# EAGLE board OpenAT_Switch_Latch (EAGLE 9.6.2)
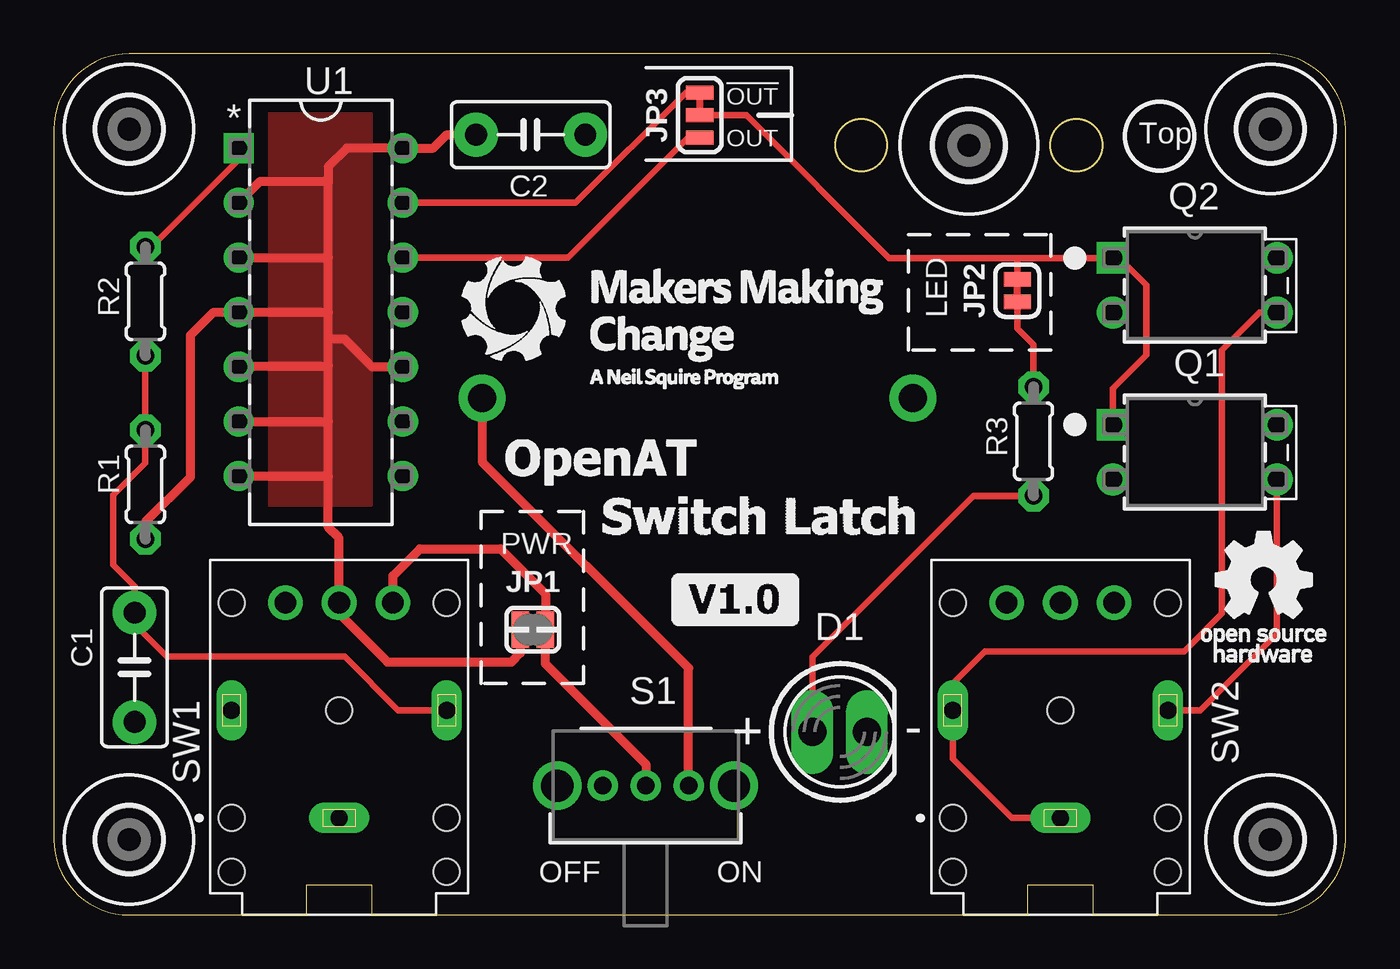
[diagram p0: board, top side]
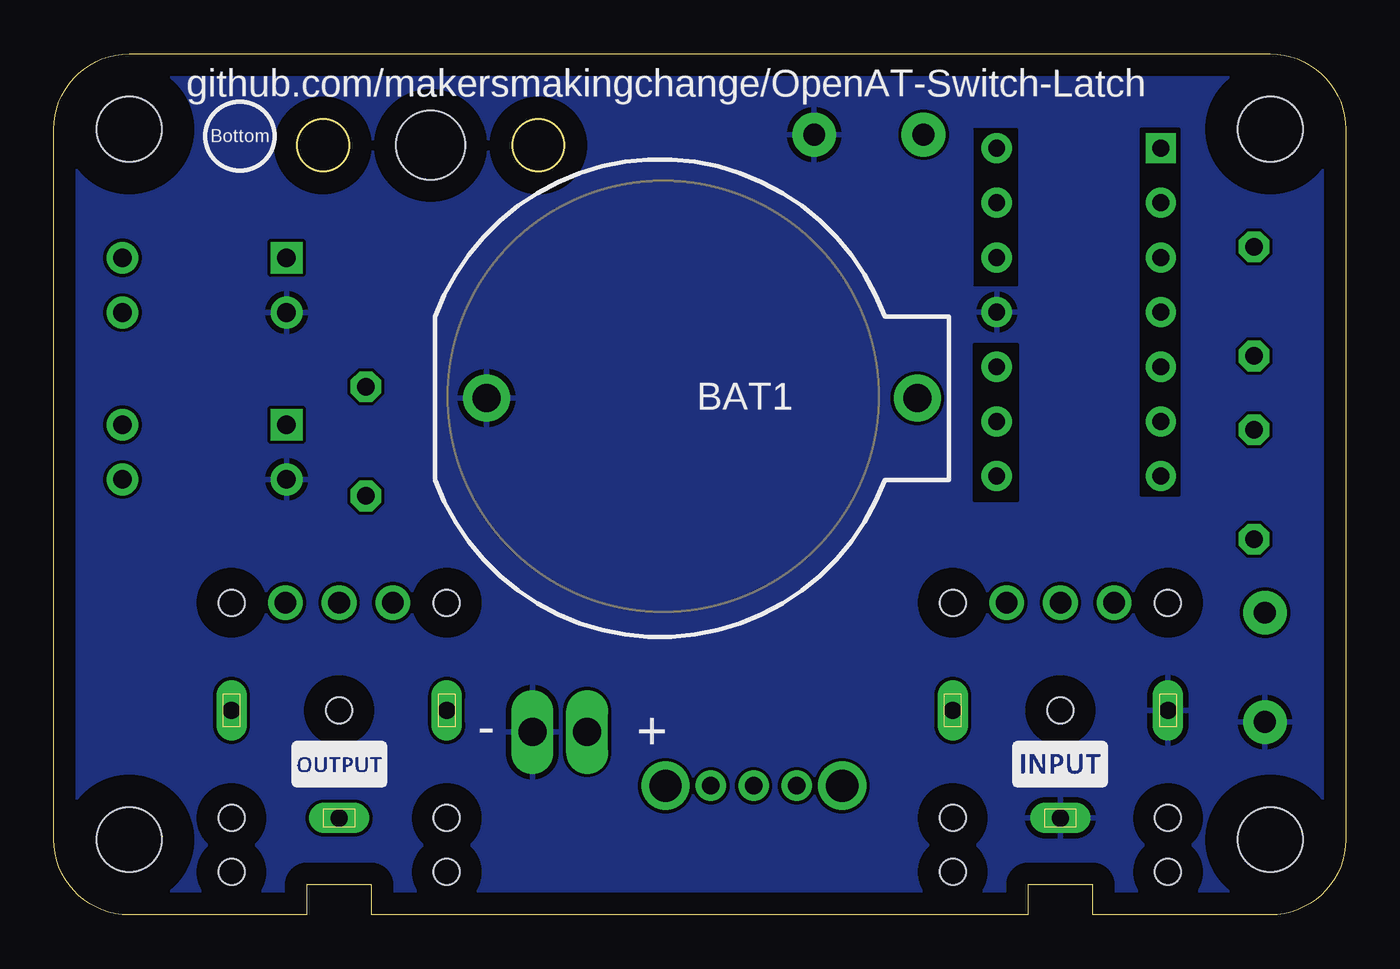
[diagram p1: board, bottom side, seen from below]

Size 60 x 40 mm. Coordinates in mm from the lower left corner, seen from the top.
Outline: 0,3.5 arc90 3.5,0 11.75,0 11.75,1.4 14.75,1.4 14.75,0 45.25,0 45.25,1.4 48.25,1.4 48.25,0 56.5,0 arc90 60,3.5 60,36.5 arc90 56.5,40 3.5,40 arc90 0,36.5 0,3.5
Outline: circle at 37.5,35.75 radius 1.2
Outline: circle at 47.5,35.75 radius 1.2
Copper layers (1*16): Top 0.035mm / dielectric 1.5mm / Bottom 0.035mm
Design rules "default *": minimum track width 6mil, minimum drill 10mil, track to track 6mil, track to pad 10mil, pad to pad 6mil, via to via 6mil, smd to smd 6mil, copper to edge 40mil, drill to drill 10mil, minimum pad ring 12mil, minimum via ring 10mil, stop-mask expansion 4mil, vias tented up to drill 0mil, thermal gap 10mil

## Footprints (pad centres in the part's own frame; a part is rotated, then mirrored left to right if it is on the bottom)
BATTCOM_20MM_PTH = drill 1.3 pad 2.184: + 11.85,0; - -8.15,0
CAP-050-030X075 = drill 1.016 pad 2.032: 1 -2.54,0; 2 2.54,0
LED_5MM_GREEN = drill 1.3 pad 1.676 long: A -1.27,0; K 1.27,0
HOLE-3MM = hole 3: 0,0
HOLE-3.2MM-CLEAR = hole 3.2: 0,0
SOLDERJUMPER_OPENED_TRACE_SILK = smd 0.813 x 1.676: 1 -0.584,0; 2 0.584,0
JUMPERS_SMT-JUMPER_2_NC_TRACE_SILK = smd 0.66 x 1.27: 1 -0.521,0; 2 0.521,0
JUMPERS_SMT-JUMPER_3_1-NC_TRACE_SILK = smd 0.66 x 1.27: 1 -1.041,0; 2 0,0; 3 1.041,0
HVM-DIP = drill 0.864 pad 1.372 square: 1 -3.81,1.27 | drill 0.864 pad 1.372: 2 -3.81,-1.27; 3 3.81,-1.27; 4 3.81,1.27
RESISTOR_0204/5 = drill 0.813 octagon: 1 -2.54,0; 2 2.54,0
SWITCH_SPDT_11MA1QS1 = drill 0.813 pad 1.321: 1 -2.007,0; 2 0,0; 3 1.981,0 | drill 1.499 pad 2.007: 4 -4.115,0; 5 4.089,0
CUI_SJ-3566AN = drill 0.8 long: 1 -5,0; 2 0,-5; 3 0,5 | drill 1: 4 5,2.5; 5 5,0; 6 5,-2.5 | hole 1.2: 5,5; 5,-5; 0,0; -5,5; -7.5,5; -5,-5; -7.5,-5
14-DIP = drill 0.787 pad 1.295 square: 1 -3.81,7.62 | drill 0.787 pad 1.295: 2 -3.81,5.08; 3 -3.81,2.54; 4 -3.81,0; 5 -3.81,-2.54; 6 -3.81,-5.08; 7 -3.81,-7.62; 8 3.81,-7.62; 9 3.81,-5.08; 10 3.81,-2.54; 11 3.81,0; 12 3.81,2.54; 13 3.81,5.08; 14 3.81,7.62

## Placement (x,y rotation side)
BAT1  BAT1  [BATTCOM_20MM_PTH]  31.75,24 0 bottom
C1  0.1uF  [CAP-050-030X075]  3.75,11.5 90 top
C2  1uF  [CAP-050-030X075]  22.15,36.24 180 top
D1  [LED_5MM_GREEN]  36.5,8.5 0 top
H1  MOUNT-HOLE-3MM  [HOLE-3MM]  3.5,3.5 0 top
H2  MOUNT-HOLE-3MM  [HOLE-3MM]  3.5,36.5 0 top
H3  MOUNT-HOLE-3MM  [HOLE-3MM]  56.5,36.5 0 top
H4  MOUNT-HOLE-3MM  [HOLE-3MM]  56.5,3.5 0 top
H5  MOUNT-HOLE-3.2MM-CLEAR  [HOLE-3.2MM-CLEAR]  42.5,35.75 0 top
JP1  [SOLDERJUMPER_OPENED_TRACE_SILK]  22.25,13.25 180 top
JP2  JUMPERS-SMT_2_NC_TRACE_SILK  [JUMPERS_SMT-JUMPER_2_NC_TRACE_SILK]  44.75,29 90 top
JP3  JUMPERS-SMT_3_1-NC_TRACE_SILK  [JUMPERS_SMT-JUMPER_3_1-NC_TRACE_SILK]  30,37.15 270 top
LABEL_INPUT  MMC_LABEL-SW-INPUT  [LABEL-INPUT]  13.25,7 0 bottom
LABEL_LOGO  MMC_LOGO-SM  [MMC_SMALL_LOGO]  30,27.5 0 top
LABEL_OUTPUT  MMC_LABEL-SW-OUTPUT  [LABEL-OUTPUT]  46.75,7 0 bottom
Q1  IRLD110-HVM-DIP  [HVM-DIP]  53,21.5 0 top
Q2  IRLD110-HVM-DIP  [HVM-DIP]  53,29.25 0 top
R1  470K  [RESISTOR_0204/5]  4.25,20 270 top
R2  22K  [RESISTOR_0204/5]  4.25,28.5 270 top
R3  10K  [RESISTOR_0204/5]  45.5,22 90 top
S1  SWITCH-SPDT-OS102011  [SWITCH_SPDT_11MA1QS1]  27.5,6 0 top
SW1  SJ-3566AN  [CUI_SJ-3566AN]  13.25,9.5 90 top
SW2  SJ-3566AN  [CUI_SJ-3566AN]  46.75,9.5 90 top
U1  CD74HC73E  [14-DIP]  12.4,28 0 top
U$1  OSHW_LOGO-XSM  [OSHW_X-SMALL_LOGO]  56.13,14.73 0 top
U$2  MMC_LABEL-OPENAT  [LABEL-OPENAT]  25.4,21.08 0 top
U$3  MMC_LABEL-SWITCH-LATCH  [LABEL-SWITCH-LATCH]  32.77,18.29 0 top
U$4  MMC_LABEL-V1.0  [LABEL-V1.0]  31.75,14.73 0 top

## Library data of the parts
BAT1 C1 C2 D1 H1-H5 LABEL_INPUT LABEL_LOGO LABEL_OUTPUT Q1 Q2 R1-R3 S1 U$1-U$4 = MMC Eagle
JP1-JP3 = MMC_SMD
SW1 SW2 = MMC Eagle; CUI_PURCHASE_URL: https://www.cuidevices.com/product/interconnect/connectors/audio-connectors/jacks/sj-356xn-series?utm_source=snapeda.com&utm_medium=referral&utm_campaign=snapedaBOM; DESCRIPTION: 3.5 mm, Stereo, Right Angle, Through Hole, SPDT Switch, Audio Jack Connector; DIGI-KEY_PART_NUMBER: CP-SJ-3566AN-ND; MF: CUI Devices; MP: SJ-3566AN; PACKAGE: None; PURCHASE-URL: https://pricing.snapeda.com/search/part/SJ-3566AN/?ref=eda
U1 = MMC Eagle; COPYRIGHT: Copyright (C) 2022 Ultra Librarian. All rights reserved.; DIGI-KEY_PART_NUMBER_1: 296-26013-5-ND; DIGI-KEY_PART_NUMBER_2: 2156-CD74HC73E-ND; MANUFACTURER_PART_NUMBER: CD74HC73E; MFR_NAME: Texas Instruments

## Nets
!OUT1: JP3.1 U1.13
!OUT2: U1.8
BATTERY: JP1.1 S1.2 SW1.6
CLK1: R2.1 U1.1
GND: BAT1.- C1.1 C2.1 D1.K Q1.2 Q2.2 SW1.1 SW1.3 U1.11
N$1: BAT1.+ S1.3
N$5: JP2.1 R3.2
N$6: D1.A R3.1
N$7: Q2.3 SW2.1 SW2.3
N$8: Q1.3 SW2.2
N$15: C1.2 R1.1 R2.2 SW1.2
OUT1: JP3.3 U1.12
OUT1-SELECT: JP2.2 JP3.2 Q1.1 Q2.1
OUT2: U1.9
VCC: C2.2 JP1.2 R1.2 SW1.5 U1.2 U1.3 U1.4 U1.5 U1.6 U1.7 U1.10 U1.14

## Tracks (layer width: path | path; a pad name or v marks a point on that pad's centre or on a via)
!OUT1
  Top 0.305: JP3.1 29.35,38.19 24.24,33.08 U1.13
BATTERY
  Top 0.406: SW1.6 15.75,15.75 17,17 20.75,17 22.83,14.92 JP1.1 22.83,11.67 27.5,7 S1.2
CLK1
  Top 0.305: R2.1 4.54,31.04 8.59,35.09 U1.1
GND
  pour Bottom: 0,0 0,40 60,40 60,0
  cutout Bottom: 17.25,29.25 15.25,29.25 15.25,36.5 17.25,36.5
  cutout Bottom: 7.75,36.5 9.5,36.5 9.5,19.5 7.75,19.5
  cutout Bottom: 15.25,26.5 17.25,26.5 17.25,19.25 15.25,19.25
N$1
  Top 0.406: S1.3 29.48,11.47 19.9,21.05 BAT1.+
N$5
  Top 0.305: R3.2 45.5,26.49 44.75,27.24 JP2.1
N$6
  Top 0.305: R3.1 42.71,19.46 35.23,11.98 D1.A
N$7
  Top 0.305: Q2.3 55.98,27.98 54.25,26.25 54.25,14 52.5,12.25 43.25,12.25 41.75,10.75 SW2.3 41.75,7.25 44.5,4.5 SW2.1
N$8
  Top 0.305: SW2.2 53.25,9.5 56.81,13.06 Q1.3
N$15
  Top 0.305: SW1.2 16,9.5 13.5,12 5.25,12 3.75,13.5 C1.2 3.75,15.25 2.75,16.25 2.75,19.5 4.25,21 R1.1 R2.2
OUT1
  Top 0.305: JP3.3 29.45,36.11 23.88,30.54 U1.12
OUT1-SELECT
  Top 0.305: Q1.1 49.19,24.44 50.75,26 50.75,29.25 49.48,30.52 Q2.1 44.75,30.52 | JP2.2 44.75,30.52 | 44.75,30.52 38.79,30.52 32.16,37.15 JP3.2
VCC
  Top 0.406: 12.75,20.38 12.75,22.92 | 12.75,22.92 12.75,25.5 | 12.75,25.5 12.75,26.75 | 12.75,26.75 12.75,28 | 12.75,28 12.75,30.54 | 12.75,30.54 12.75,34 | 12.75,34 12.75,34.75 13.62,35.62 U1.14 17.62,35.62 18.24,36.24 C2.2 | U1.2 9.59,34.08 12.67,34.08 12.75,34 | U1.3 12.75,30.54 | 12.75,28 U1.4 7.43,28 6.35,26.92 6.35,20.35 4.25,18.25 R1.2 | U1.5 8.59,25.5 12.75,25.5 | U1.6 12.75,22.92 | U1.7 12.75,20.38 | U1.10 14.79,25.46 13.5,26.75 12.75,26.75 | 12.75,20.38 12.75,18 13.25,17.5 SW1.5 13.25,14 15.5,11.75 21.25,11.75 21.67,12.17 JP1.2
  pour Top: 14.75,19 10,19 10,37.25 14.75,37.25

## Text on the board
tPlace: !OUT | OUT | LED | PWR | OFF | ON
bPlace: github.com/makersmakingchange/OpenAT-Switch-Latch | Bottom
tNames: Top